# EAGLE board SuperSensors (EAGLE 7.1.0)
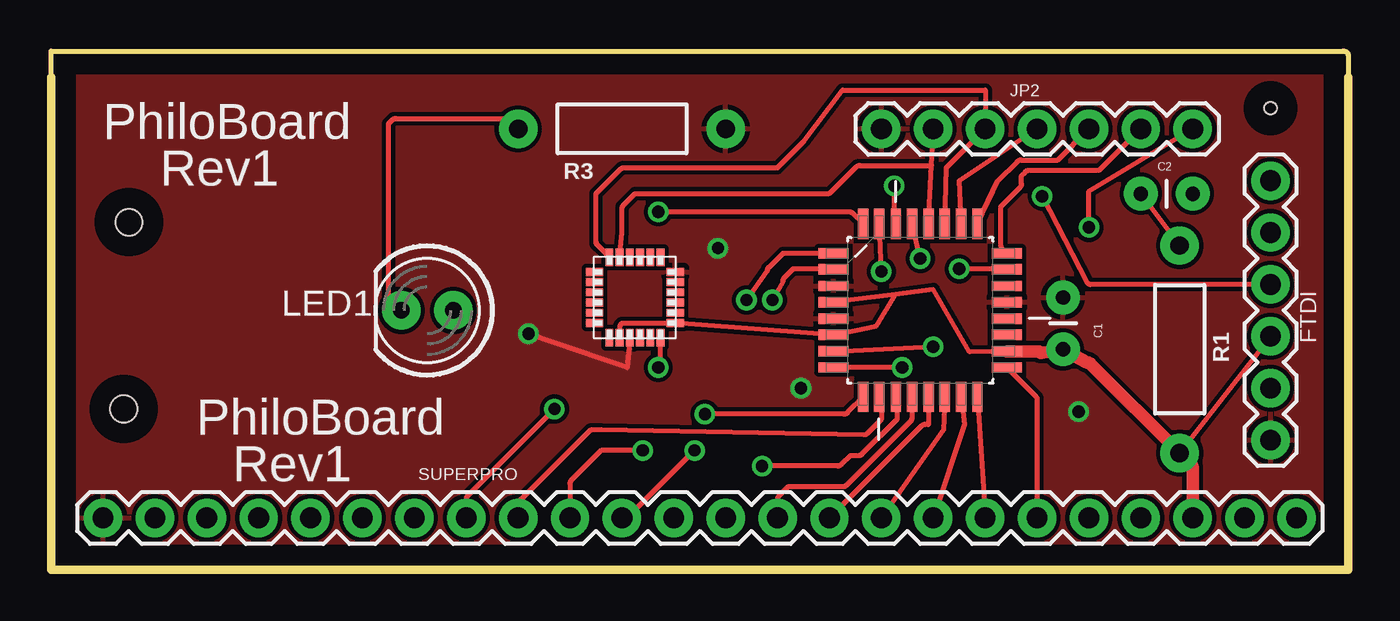
[diagram p0: board, top side]
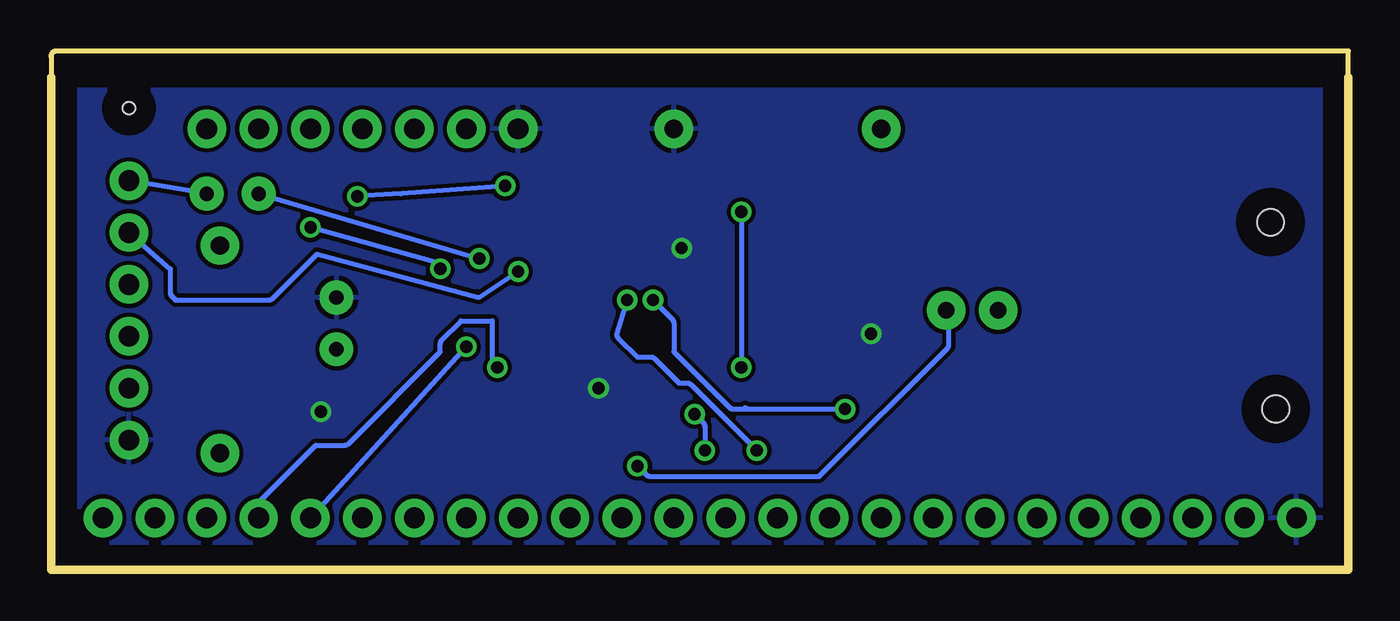
[diagram p1: board, bottom side, seen from below]

Size 63.5 x 25.4 mm. Coordinates in mm from the lower left corner, seen from the top.
Outline: 63.5,24.13 63.5,23.11
Outline: 63.5,23.11 63.5,0 0,0 0,24.13 0,25.4 63.25,25.4 arc-90 63.5,25.15 63.5,23.11
Copper layers (1*16): Top 0.035mm / dielectric 1.5mm / Bottom 0.035mm
Design rules "default *": minimum track width 10mil, minimum drill 20mil, track to track 8mil, track to pad 8mil, pad to pad 8mil, via to via 8mil, smd to smd 8mil, copper to edge 40mil, drill to drill 8mil, minimum pad ring 10mil, minimum via ring 8mil, stop-mask expansion 4mil, vias tented up to drill 0mil, thermal gap 10mil
Holes 0.6 mm at 59.69,22.61
Holes 1.3 mm at 3.56,7.87 3.81,17.02

## Footprints (pad centres in the part's own frame; a part is rotated, then mirrored left to right if it is on the bottom)
CAP-PTH-SMALL = drill 0.7 pad 1.651: 1 0,0; 2 2.54,0
1X06 = drill 1.016 pad 1.88: 1 0,0; 2 2.54,0; 3 5.08,0; 4 7.62,0; 5 10.16,0; 6 12.7,0
1X07 = drill 1.016 pad 1.88: 1 0,0; 2 2.54,0; 3 5.08,0; 4 7.62,0; 5 10.16,0; 6 12.7,0; 7 15.24,0
LED5MM = drill 0.813 pad 1.88: A -1.27,0; K 1.27,0
AXIAL-0.4 = drill 0.9 pad 1.88: P$1 -5.08,0; P$2 5.08,0
1X24 = drill 1.016 pad 1.88: 2 -26.67,0; 3 -24.13,0; 4 -21.59,0; 5 -19.05,0; 6 -16.51,0; 7 -13.97,0; 8 -11.43,0; 9 -8.89,0; 10 -6.35,0; 11 -3.81,0; 12 -1.27,0; 13 1.27,0; 14 3.81,0; 15 6.35,0; 16 8.89,0; 17 11.43,0; 18 13.97,0; 19 16.51,0; 20 19.05,0; 21 21.59,0; 22 24.13,0; 23 26.67,0; 24 29.21,0; 25 31.75,0
QFP80P900X900X120-32N = smd 1.473 x 0.508: 1 -4.242,2.794; 2 -4.242,2.007; 3 -4.242,1.194; 4 -4.242,0.406; 5 -4.242,-0.406; 6 -4.242,-1.194; 7 -4.242,-2.007; 8 -4.242,-2.794; 17 4.242,-2.794; 18 4.242,-2.007; 19 4.242,-1.194; 20 4.242,-0.406; 21 4.242,0.406; 22 4.242,1.194; 23 4.242,2.007; 24 4.242,2.794 | smd 0.508 x 1.473: 9 -2.794,-4.242; 10 -2.007,-4.242; 11 -1.194,-4.242; 12 -0.406,-4.242; 13 0.406,-4.242; 14 1.194,-4.242; 15 2.007,-4.242; 16 2.794,-4.242; 25 2.794,4.242; 26 2.007,4.242; 27 1.194,4.242; 28 0.406,4.242; 29 -0.406,4.242; 30 -1.194,4.242; 31 -2.007,4.242; 32 -2.794,4.242
QFN.24.4X4 = smd 0.85 x 0.38: 1 -1.975,1.25; 2 -1.975,0.75; 3 -1.975,0.25; 4 -1.975,-0.25; 5 -1.975,-0.75; 6 -1.975,-1.25; 13 1.975,-1.25; 14 1.975,-0.75; 15 1.975,-0.25; 16 1.975,0.25; 17 1.975,0.75; 18 1.975,1.25 | smd 0.38 x 0.85: 7 -1.25,-1.975; 8 -0.75,-1.975; 9 -0.25,-1.975; 10 0.25,-1.975; 11 0.75,-1.975; 12 1.25,-1.975; 19 1.25,1.975; 20 0.75,1.975; 21 0.25,1.975; 22 -0.25,1.975; 23 -0.75,1.975; 24 -1.25,1.975

## Placement (x,y rotation side)
C1  0.1uF  [CAP-PTH-SMALL]  49.53,13.34 270 top
C2  0.1uF  [CAP-PTH-SMALL]  55.88,18.41 180 top
FTDI  FTDI  [1X06]  59.69,19.05 270 top
JP2  [1X07]  40.64,21.59 0 top
LED1  0.25W  [LED5MM]  18.42,12.7 180 top
R1  21K  [AXIAL-0.4]  55.24,10.8 90 top
R3  21K  [AXIAL-0.4]  27.94,21.59 180 top
SUPERPRO  M24  [1X24]  29.21,2.54 0 top
U1  [QFP80P900X900X120-32N]  42.54,12.7 0 top
U$1  MPU-6050  [QFN.24.4X4]  28.57,13.34 0 top

## Library data of the parts
C1 C2 = SparkFun-Capacitors
FTDI JP2 SUPERPRO = SparkFun-Connectors
LED1 = SparkFun-LED
R1 R3 = SparkFun-Passives
U1 = Ava; DESCRIPTION: 8-bit Microcontroller with In-System Programmable Flash; MPN: ATMEGA328P-AU; OC_FARNELL: 1715486; OC_NEWARK: 14R4631; PACKAGE: TQFP-32; SUPPLIER: Atmel
U$1 = invensense

## Nets
3V3: SUPERPRO.25
9V: SUPERPRO.24
A0: SUPERPRO.3
A1: SUPERPRO.4
A2: SUPERPRO.5
A3: SUPERPRO.6
ADC0: JP2.7 U1.23
ADC1: JP2.6 U1.24
ADC2: JP2.5 U1.25
ADC3: JP2.4 U1.26
ADC6: U1.19
ADC7: U1.22
B0: SUPERPRO.15 U1.12
B1: SUPERPRO.16 U1.13
B2: SUPERPRO.17 U1.14
B3: SUPERPRO.18 U1.15
B4: SUPERPRO.19 U1.16
B5: SUPERPRO.20 U1.17
B6: SUPERPRO.21 U1.7
B7: SUPERPRO.22 U1.8
CTS: FTDI.5
DTR: C2.1 FTDI.1
GND: C1.1 FTDI.6 JP2.1 R3.P$1 SUPERPRO.2 U1.3 U1.5 U1.21 U$1.9 U$1.18
MPUINT: U1.32 U$1.12
N$1: LED1.A U1.11
N$5: LED1.K R3.P$2
O0: SUPERPRO.7
O1: SUPERPRO.8
RD: SUPERPRO.9 U1.1
RESET: C2.2 R1.P$2 U1.29
RX: FTDI.3 U1.30
S0: SUPERPRO.11 U1.2
S1: SUPERPRO.12 U1.9
S2: SUPERPRO.13
S3: SUPERPRO.14
SCL: JP2.2 U1.28 U$1.23
SDA: JP2.3 U1.27 U$1.24
TX: FTDI.2 U1.31
VCC: C1.2 FTDI.4 R1.P$1 SUPERPRO.23 U1.4 U1.6 U1.18 U$1.8 U$1.13
WR: SUPERPRO.10 U1.10

## Tracks (layer width: path | path; a pad name or v marks a point on that pad's centre or on a via)
ADC0  (via drill 0.6)
  Top 0.254: U1.23 arc45 46.72,14.73 v44.45,14.73 | v50.8,16.76 50.8,18.54 JP2.7
  Bottom 0.254: v44.45,14.73 44.45,14.99 v50.8,16.76
ADC1
  Top 0.254: U1.24 46.56,15.72 arc-45 46.48,15.9 46.48,17.78 47.42,18.72 arc45 47.5,18.9 47.5,19.3 47.68,19.48 arc-45 47.86,19.56 51.2,19.56 arc45 51.38,19.63 JP2.6 53.34,21.19 arc-45 53.27,21.01
ADC2
  Top 0.254: U1.25 46.35,19.05 47.3,19.99 arc-45 47.48,20.07 49.28,20.07 JP2.5
ADC3
  Top 0.254: U1.26 44.45,19.05 JP2.4
B0
  Top 0.254: U1.12 42.14,7.45 arc-45 42.06,7.27 38.94,4.14 arc-45 38.76,4.06 36.07,4.06 35.63,3.63 arc45 35.56,3.45 SUPERPRO.15
B1
  Top 0.254: U1.13 42.95,7.17 arc-45 42.93,7.11 42.78,7.11 arc45 42.6,7.04 SUPERPRO.16
B2
  Top 0.254: U1.14 43.69,6.86 SUPERPRO.17
B3
  Top 0.254: U1.15 44.7,7.11 SUPERPRO.18
B4
  Top 0.254: U1.16 SUPERPRO.19
B5
  Top 0.254: U1.17 48.19,8.51 arc-45 48.26,8.33 SUPERPRO.20
B6  (via drill 0.6)
  Top 0.254: U1.7 v43.18,10.92
  Bottom 0.254: v43.18,10.92 SUPERPRO.21
B7  (via drill 0.6)
  Top 0.254: v41.66,9.91 U1.8
  Bottom 0.254: SUPERPRO.22 53.34,3.2 arc45 53.27,3.38 50.55,6.1 49.13,6.1 arc-45 48.95,6.17 44.45,10.67 44.45,11.07 arc45 44.38,11.25 43.43,12.19 41.91,12.19 41.91,10.27 arc-45 41.84,10.09 v41.66,9.91
DTR
  Bottom 0.254: C2.1 FTDI.1
GND  (via drill 0.6)
  Top 0.254: U$1.9 28.19,9.91 v23.37,11.56
  other vias: 32.64,15.75 50.29,7.75 36.7,8.89
  pour Top: -1.27,24.77 -1.27,-2.54 65.15,-2.54 arc90 65.41,-2.29 65.41,26.67 -1.02,26.67 arc90 -1.27,26.42
  pour Bottom: 0.64,23.5 62.86,23.5 62.86,0.63 1.27,0.63 0.89,0.63 arc-90 0.64,0.89
MPUINT  (via drill 0.6)
  Top 0.254: U1.32 39.24,17.45 arc45 39.06,17.53 v29.72,17.53 | v29.72,9.91 29.75,9.94 arc45 29.82,10.12 U$1.12
  Bottom 0.254: v29.72,17.53 v29.72,9.91
N$1  (via drill 0.6)
  Top 0.254: U1.11 arc-45 41.4,8.34 41.4,7.37 39.7,5.66 arc-45 39.52,5.59 39.12,5.59 38.68,5.15 arc-45 38.5,5.08 v34.8,5.08
  Bottom 0.254: v34.8,5.08 34.36,4.65 arc-45 34.18,4.57 25.91,4.57 19.63,10.85 arc-45 19.56,11.03 19.56,12.19 19.61,12.24 arc45 19.69,12.42 LED1.A
N$5
  Top 0.254: LED1.K 16.58,13.26 arc-45 16.51,13.44 16.51,21.84 16.69,22.02 arc-45 16.87,22.1 22.61,22.1 22.79,21.92 arc-45 22.86,21.74 R3.P$2
RD  (via drill 0.6)
  Top 0.254: U1.1 35.81,15.49 35.13,14.81 arc45 35.05,14.63 v34.04,13.21 | v24.64,7.87 20.39,3.63 arc45 20.32,3.45 SUPERPRO.9
  Bottom 0.254: 29.54,7.95 arc-45 29.36,7.87 | 29.36,7.87 v24.64,7.87 | v34.04,13.21 33.09,12.27 arc45 33.02,12.09 33.02,10.67 30.3,7.95 arc-45 30.12,7.87 29.36,7.87
RESET  (via drill 0.6)
  Top 0.254: v42.54,15.24 U1.29 | R1.P$2 C2.2
  Bottom 0.254: C2.2 v42.54,15.24
RX  (via drill 0.6)
  Top 0.254: FTDI.3 50.91,13.97 arc-45 50.73,14.04 v48.51,18.29 | U1.30 U1.30 arc-45 41.27,17.12 v41.27,18.8
  Bottom 0.254: v41.27,18.8 46.35,18.41 v48.51,18.29
S0  (via drill 0.6)
  Top 0.254: U1.2 arc45 38.24,14.73 36.32,14.73 35.89,14.3 arc45 35.81,14.12 v35.31,13.21 | v28.96,5.84 26.92,5.84 25.47,4.39 arc45 25.4,4.21 SUPERPRO.11
  Bottom 0.254: v35.31,13.21 35.81,11.53 arc-45 35.74,11.36 34.8,10.41 34.14,10.41 arc45 33.96,10.34 32.77,9.14 32.36,9.14 arc45 32.18,9.07 v28.96,5.84
S1  (via drill 0.6)
  Top 0.254: U1.9 38.99,7.69 arc-45 38.81,7.62 v32,7.62 | v31.5,5.84 28.27,2.61 arc-45 28.09,2.54 SUPERPRO.12
  Bottom 0.254: v32,7.62 31.57,7.19 arc45 31.5,7.01 v31.5,5.84
SCL
  Top 0.254: U1.28 43.09,19.79 | 43.09,19.79 JP2.2 | U$1.23 27.94,16.51 27.94,17.67 arc-45 28.01,17.85 28.57,18.41 37.99,18.41 arc45 38.17,18.49 39.4,19.72 arc-45 39.58,19.79 43.09,19.79
SDA
  Top 0.254: U1.27 43.81,19.69 JP2.3 45.72,23.5 38.73,23.5 36.83,20.95 35.56,19.69 28.05,19.69 arc45 27.87,19.61 26.67,18.41 26.67,16.07 arc45 26.74,15.89 U$1.24
TX  (via drill 0.6)
  Top 0.254: v40.64,14.6 U1.31
  Bottom 0.254: v40.64,14.6 42.54,13.34 50.49,15.45 52.66,13.28 arc45 52.84,13.21 57.4,13.21 57.58,13.39 arc45 57.66,13.57 57.66,14.73 FTDI.2
VCC
  Top 0.254: U$1.8 27.83,11.84 arc-45 27.9,12.02 27.94,12.06 30.5,12.06 arc45 U$1.13 U1.6 40.39,11.94 41.34,13.48 | R1.P$1 FTDI.4 | U1.18 44.96,10.67 43.18,13.72 41.34,13.48 | 41.34,13.48 U1.4
  Top 0.61: SUPERPRO.23 55.88,4.98 arc45 55.81,5.15 R1.P$1 50.87,10.09 arc45 50.7,10.16 C1.2 48.44,10.62 arc45 48.26,10.69 U1.18
WR
  Top 0.254: U1.10 40.57,8.43 arc-45 40.64,8.25 40.64,7.37 39.95,6.68 arc-45 39.77,6.6 26.92,6.86 26.52,6.86 arc45 26.34,6.78 22.93,3.38 arc45 22.86,3.2 SUPERPRO.10

## Text on the board
tNames: PhiloBoard | Rev1 | PhiloBoard | Rev1